# Altium PCB 1602.PcbDoc
Units mil, origin at the board's own origin, x right, y up, seen from the top; angles counter-clockwise.
Board outline 6000 x 4000 mil, 2 copper layers (Top Layer, Bottom Layer); 44 components, 53 nets, 202 pads, 0 vias.
Unrouted connection lines stored in the file: 125.
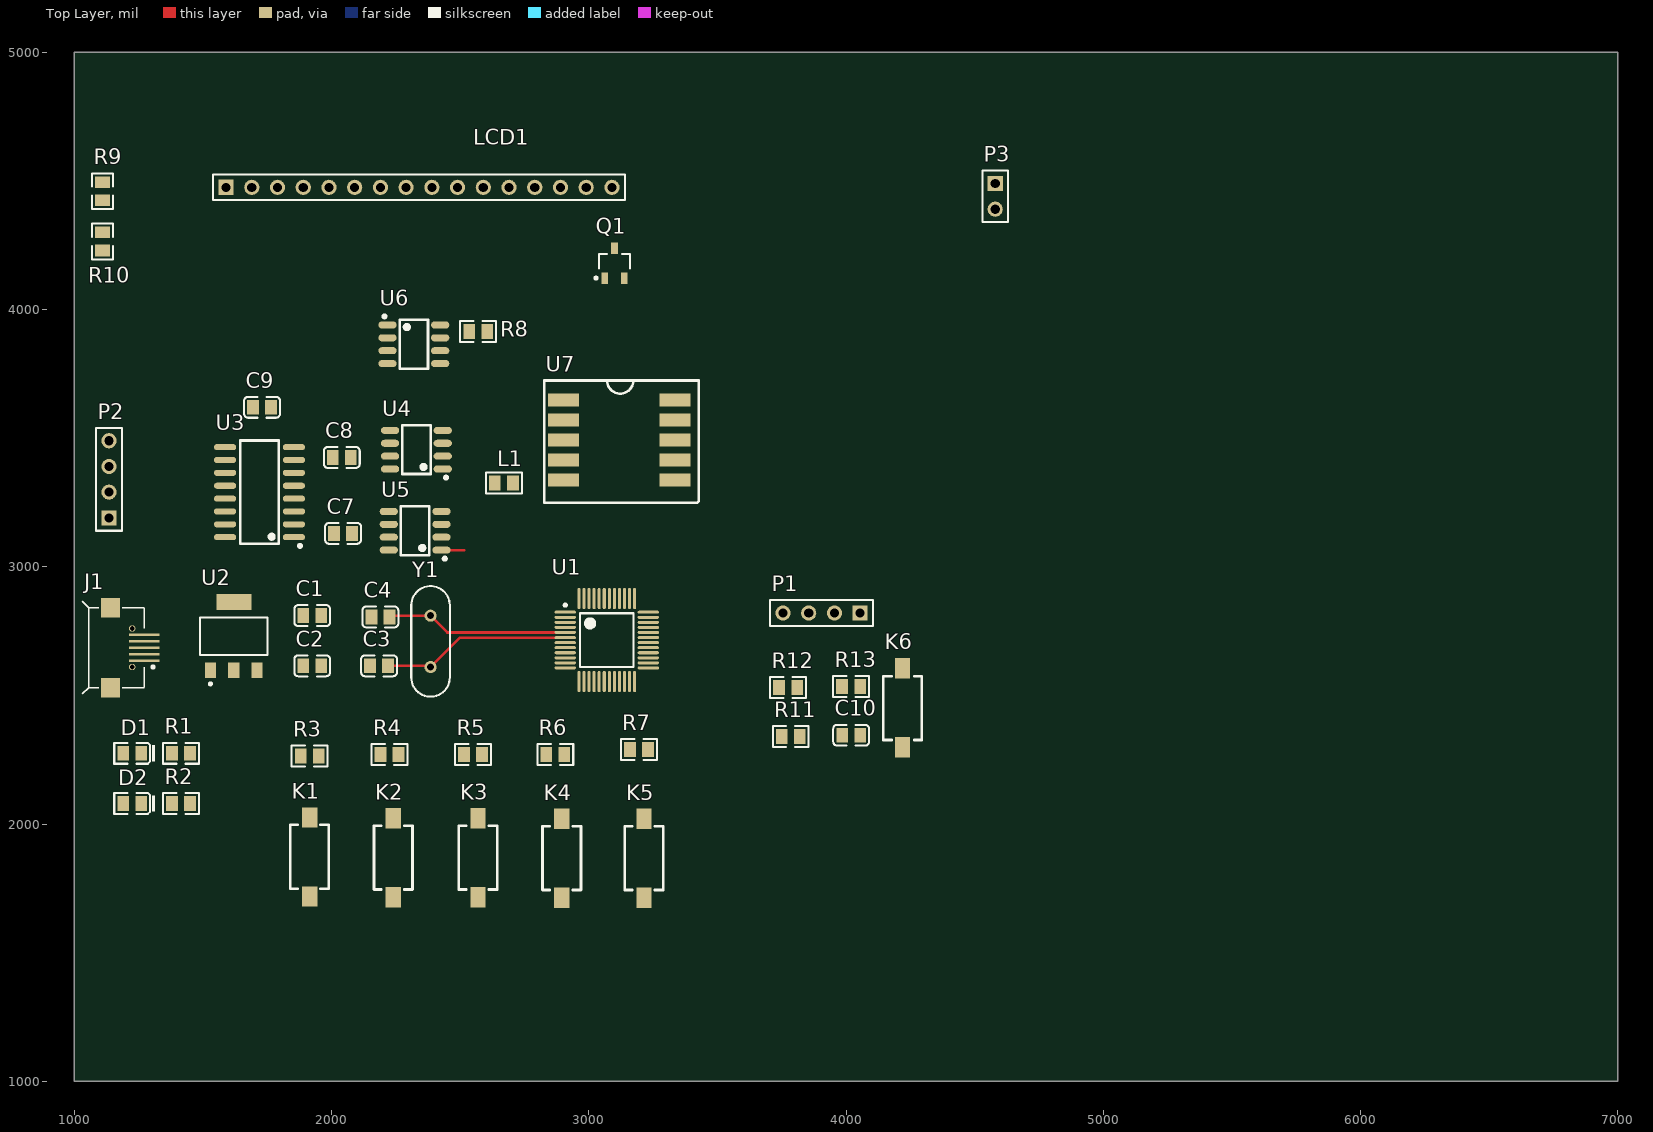
[diagram p0: Top Layer view]
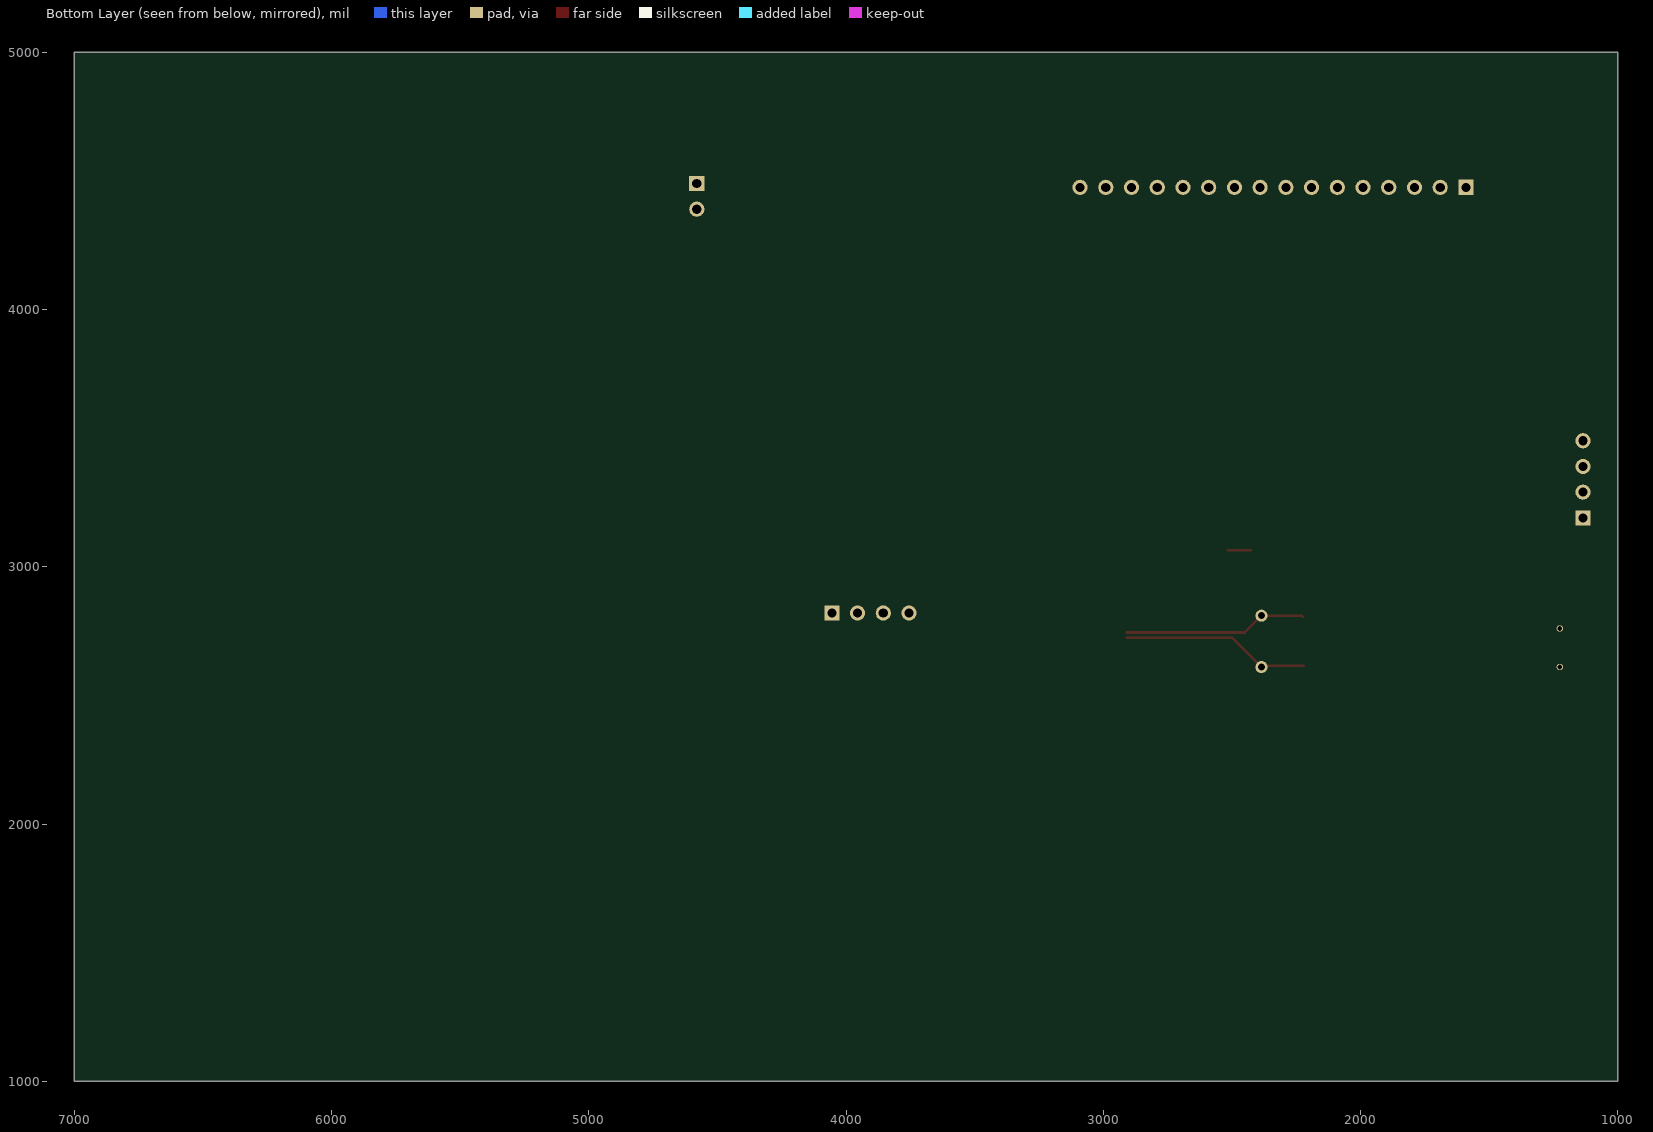
[diagram p1: Bottom Layer view, seen from below]

## Layer stack, top to bottom
Top Solder: solder mask 0.4, Solder Resist, Dk 3.5
Top Layer: signal copper 1.4
Dielectric 1: dielectric 12.6, FR-4, Dk 4.8
Bottom Layer: signal copper 1.4
Bottom Solder: solder mask 0.4, Solder Resist, Dk 3.5

## Board outline
1000,1000 7000,1000 7000,5000 1000,5000

## Design rules (kind name [scope] priority, off if disabled: settings)
Clearance [All] p1: gap=6 ignorepadtopadclearanceinfootprint=FALSE
PolygonConnect [All] p1: connectstyle=Relief reliefconductorwidth=10 reliefentries=4 polygonreliefangle="90 Angle" airgapwidth=10
RoutingVias [All] p1: holewidth=28 width=50 viastyle="Through Hole" minholewidth=28 minwidth=50 maxholewidth=28 maxwidth=50
SolderMaskExpansion [All] p1: expansion=4
Width [All] p1: maxlimit=40 minlimit=8 preferedwidth=10
30 further rules are at their usual default settings.

## Components (designator, comment, footprint, x,y, rotation, side; value= is the part's Value field where it differs from the comment)
C1 "1uF" LC-0805_C 1924.96,2810 r0 top
C2 "0.1uF" LC-0805_C 1924.96,2615 r0 top
C3 "22pf" LC-0805_C 2184.96,2615 r0 top
C4 "22pf" LC-0805_C 2189.96,2805 r0 top
C7 "1UF" LC-0805_C 2044.96,3130 r180 top
C8 "1UF" LC-0805_C 2040,3425 r180 top
C9 "100NF" LC-0805_C 1729.96,3620 r0 top
C10 "1uF" LC-0805_C 4020,2345 r180 top
D1 "SYS_LED" LC-0805_LED_S1 1225.04,2275 r180 top
D2 "PWR_LED" LC-0805_LED_S1 1225.04,2080 r180 top
J1 "USB-MICRO-B" Micro_USB 1055.71,2685.2 r180 top
K1 "" SW-SMD1 1915,2025 r270 top
K2 "" SW-SMD1 2240,2022.09 r270 top
K3 "" SW-SMD1 2570,2022.09 r270 top
K4 "" SW-SMD1 2895,2020 r270 top
K5 "" SW-SMD1 3215,2020 r270 top
K6 "RESET" SW-SMD1 4220,2297.91 r90 top
L1 "1uH ±10%" LC-0805_L 2669.96,3325 r0 top
LCD1 "1602液晶显示器" LCD1602A 1590,4475 r0 top
P1 "SWD" HDR1X4 4055,2820 r180 top
P2 "喇叭" HDR1X4 1135,3190 r90 top
P3 "ANT" HDR1X2 4580,4490 r270 top
Q1 "AO3400A N" LC-SOT-23-3L 3100,4180 r270 top
R1 "1KΩ (1001) ±1%" LC-0805_R 1414.96,2275 r0 top
R2 "1KΩ (1001) ±1%" LC-0805_R 1415,2080 r0 top
R3 "4.7K" LC-0805_R 1914.96,2265 r0 top
R4 "4.7K" LC-0805_R 2224.96,2270 r0 top
R5 "4.7K" LC-0805_R 2550.04,2270 r0 top
R6 "4.7K" LC-0805_R 2869.96,2270 r0 top
R7 "1KΩ (1001) ±1%" LC-0805_R 3194.96,2290 r0 top
R8 "47K" LC-0805_R 2569.96,3915 r0 top
R9 "1KΩ" LC-0805_R 1110,4460 r90 top
R10 "1KΩ" LC-0805_R 1110,4264.96 r90 top
R11 "47k" LC-0805_R 3785,2340 r0 top
R12 "47k" LC-0805_R 3775.04,2530 r180 top
R13 "10K" LC-0805_R 4019.96,2535 r180 top
U1 "STM32F103C8T6" TQFP48 3070,2715 r0 top
U2 "AMS1117" SOT223 1620,2730 r0 top
U3 "PAM8403" LC-SOP-16_208mil 1720,3290 r90 top
U4 "MCP41010" LC-SOP-8_150mil 2330,3455 r90 top
U5 "MCP41010" LC-SOP-8_150mil 2325,3140 r90 top
U6 "EEPROM/AT24C02" LC-SOIC-8_150mil 2320,3865 r270 top
U7 "TEA5767" TEA5767 2902,3649 r0 top
Y1 "12M" XTAL-RAD-0.2 2385,2710 r90 top

## Footprints (in the part's own frame and the unit in brackets; to place one, negate y for a bottom-side part, rotate by r counter-clockwise, add the part's x,y. Pads: shape width x height; smd on the part's side, far side on the other; paste and mask are expansions set on the pad)
HDR1X2 [mm] "Connector; Header; 2 Position"
  rect 1.5x1.5 hole 0.9: 1(0,0)
  round 1.5 hole 0.9: 2(2.54,0)
  silkscreen extent -1.27,-1.27 3.81,1.27, body extent -1.27,-1.27 3.81,1.27, height 7.58
HDR1X4 [mm] "Connector; Header; 4 Position"
  rect 1.5x1.5 hole 0.9: 1(0,0)
  round 1.5 hole 0.9: 2(2.54,0) 3(5.08,0) 4(7.62,0)
  silkscreen extent -1.27,-1.27 8.89,1.27, body extent -1.27,-1.27 8.89,1.27, height 7.58
LC-0805_C [mm]
  rect 1.16x1.47 smd: 1(-0.89,0) 2(0.89,0)
  silkscreen extent -1.77,-1.04 1.77,1.04, body extent -1,-0.62 1,0.63, height 0.77
LC-0805_L [mm]
  rect 1.16x1.47 smd: 1(-0.89,0) 2(0.89,0)
  silkscreen extent -1.77,-1.04 1.77,1.03, body extent -1.02,-0.64 1.03,0.64, height 0.6
LC-0805_LED_S1 [mm]
  rect 1.16x1.47 smd: A(0.89,0) K(-0.89,0)
  silkscreen extent -2.25,-1.04 1.77,1.03, body extent -1.01,-0.62 1.01,0.62, height 1.1
LC-0805_R [mm]
  rect 1.16x1.47 smd: 1(-0.89,0) 2(0.89,0)
  silkscreen extent -1.77,-1.04 1.77,1.03, body extent -1,-0.62 1,0.63, height 0.49
LC-SOIC-8_150mil [mm]
  oval 0.7x1.8 smd: 1(-1.905,-2.6) 2(-0.635,-2.6) 3(0.635,-2.6) 4(1.905,-2.6) 5(1.905,2.6) 6(0.635,2.6) 7(-0.635,2.6) 8(-1.905,2.6)
  silkscreen extent -2.9,-3.05 2.4,1.4
LC-SOP-8_150mil [mm]
  oval 0.7x1.8 smd: 1(-1.905,-2.6) 2(-0.635,-2.6) 3(0.635,-2.6) 4(1.905,-2.6) 5(1.905,2.6) 6(0.635,2.6) 7(-0.635,2.6) 8(-1.905,2.6)
  silkscreen extent -2.9,-3.08 2.4,1.4, body extent -2.5,-3.1 2.5,3.1, height 1.75
LC-SOP-16_208mil [mm]
  oval 0.6x2.2 smd: 1(-4.445,-3.4) 2(-3.175,-3.4) 3(-1.905,-3.4) 4(-0.635,-3.4) 5(0.635,-3.4) 6(1.905,-3.4) 7(3.175,-3.4) 8(4.445,-3.4) 9(4.445,3.4) 10(3.175,3.4) 11(1.905,3.4) 12(0.635,3.4) 13(-0.635,3.4) 14(-1.905,3.4) 15(-3.175,3.4) 16(-4.445,3.4)
  silkscreen extent -5.45,-4.15 5.1,1.9
LC-SOT-23-3L [mm] "http://www.aosmd.com/res/packaging_information/SOT-23-3L.pdf"
  rect 1.15x0.65 smd: 1(1.475,-0.95) 2(1.475,0.95) 3(-1.475,0)
  silkscreen extent -0.9,-1.95 1.6,1.55, body extent -0.9,-1.55 0.9,1.55, height 1.25
LCD1602A [mm] "LCD1602A液晶显示器"
  rect 1.5x1.5 hole 0.9: 1(0,0)
  round 1.5 hole 0.9: 2(2.54,0) 3(5.08,0) 4(7.62,0) 5(10.16,0) 6(12.7,0) 7(15.24,0) 8(17.78,0) 9(20.32,0) 10(22.86,0) 11(25.4,0) 12(27.94,0) 13(30.48,0) 14(33.02,0) 15(35.56,0) 16(38.1,0)
  silkscreen extent -1.27,-1.27 39.37,1.27, body extent -8,-34.5 72.5,2, height 21.34
Micro_USB [mm] "5P 贴片 带定位柱"
  rect 3x0.25 smd: 1(-5.508,1.3) 2(-5.508,0.65) 3(-5.508,0) 4(-5.508,-0.65) 5(-5.508,-1.3)
  round 0.635 hole 0.457 unplated: 6(-4.3,1.9) 7(-4.3,-1.9)
  rect 1.9x1.9 smd: 8(-2.15,3.95) 9(-2.15,-3.95)
  silkscreen extent -6.47,-4.57 0.63,4.57
SOT223 [mm] "SOT-223/SC-73; 4 Leads; Body 6.7 x 7.3 mm, inc. leads (LxW max)"
  rect 1.1x1.55 smd: 1(-2.3,-3.375) 2(0,-3.375) 3(2.3,-3.375)
  rect 3.45x1.55 smd: 4(0,3.375)
  silkscreen extent -3.35,-4.82 3.35,1.85, body extent -3.25,-3.47 3.25,3.49, height 1.66
SW-SMD1 [mm]
  rect 2x1.5 smd: 1(0,0) 2(7.8,0)
  silkscreen extent 0.73,-1.9 7.03,1.9, body extent -0.06,-1.94 7.83,1.91, height 2.5
TEA5767 [mil]
  rect 120x50 smd: 1(0,0) 2(0,-78) 3(0,-156) 4(0,-234) 5(0,-312) 6(433,-312) 7(433,-234) 8(433,-156) 9(433,-78) 10(433,0)
  silkscreen extent -75,-400 525,75
TQFP48 [mm] "Thin QFP, 48-Leads, Body 7x7mm, Pitch 0.5mm, IPC Low Density"
  oval 2.1x0.3 smd: 1(-4.1,2.75) 2(-4.1,2.25) 3(-4.1,1.75) 4(-4.1,1.25) 5(-4.1,0.75) 6(-4.1,0.25) 7(-4.1,-0.25) 8(-4.1,-0.75) 9(-4.1,-1.25) 10(-4.1,-1.75) 11(-4.1,-2.25) 12(-4.1,-2.75) 25(4.1,-2.75) 26(4.1,-2.25) 27(4.1,-1.75) 28(4.1,-1.25) 29(4.1,-0.75) 30(4.1,-0.25) 31(4.1,0.25) 32(4.1,0.75) 33(4.1,1.25) 34(4.1,1.75) 35(4.1,2.25) 36(4.1,2.75)
  oval 0.3x2.1 smd: 13(-2.75,-4.1) 14(-2.25,-4.1) 15(-1.75,-4.1) 16(-1.25,-4.1) 17(-0.75,-4.1) 18(-0.25,-4.1) 19(0.25,-4.1) 20(0.75,-4.1) 21(1.25,-4.1) 22(1.75,-4.1) 23(2.25,-4.1) 24(2.75,-4.1) 37(2.75,4.1) 38(2.25,4.1) 39(1.75,4.1) 40(1.25,4.1) 41(0.75,4.1) 42(0.25,4.1) 43(-0.25,4.1) 44(-0.75,4.1) 45(-1.25,4.1) 46(-1.75,4.1) 47(-2.25,4.1) 48(-2.75,4.1)
  silkscreen extent -4.22,-2.65 2.65,3.57, body extent -4.5,-4.5 4.5,4.5, height 1.2
XTAL-RAD-0.2 [mm] "Radial Cap, Thru-Hole; 2 Leads; 0.2 in Pin Spacing"
  round 1.2 hole 0.7: 1(-2.54,0) 2(2.54,0)
  silkscreen extent -5.46,-1.91 5.46,1.91, body extent -5.33,-2.05 5.33,2.05, height 3.22

## Part data
C1 C2 C3 C4 C7 C8 C9 C10: library part "0805 1uF (105) 10% 50V", "贴片电容", Package=0805, SuppliersPartNumber=C28323, ComponentLink1Description=供应商链接, ComponentLink1URL=http://www.szlcsc.com/product/details_29074.html, Supplier=LC
D1 D2: library part "0805 翠绿", "发光二极管", Package=0805, SuppliersPartNumber=C2297, ComponentLink1Description=供应商链接, ComponentLink1URL=http://www.szlcsc.com/product/details_2670.html, Supplier=LC
J1: "USB 2.0, Right Angle, SMT, A Type, Receptacle, 5 Position, Black", PackageDocument=15-Nov-2002, ComponentLink1Description="Manufacturer Link", ComponentLink1URL=http://www.tycoelectronics.com/, ComponentLink2Description="Packaging Specification", ComponentLink2URL=http://ecommas.tycoelectronics.com/commerce/DocumentDelivery/DDEController?Action=showdoc&DocId=Customer+Drawing%7F440478%7FB%7Fpdf%7FEnglish%7FC_440478_B.pdf, ContactMaterial="Phosphor Bronze", ContactPlating="Gold (30) over Nickel", DatasheetDocument=15-Nov-2002, DrillSize="Corresponds to nominal value.", HousingMaterial=Thermoplastic, PackageReference=440478, PanelGround=Without, PCB_Layout="Complies with manufacturer's recommendation.", Published=15-Jul-2004, Publisher="Altium Limited"
K1 K2 K3 K4 K5 K6: library part BUTTON-S
L1: library part "0805 1uH 10%", "贴片电感", Package=0805, SuppliersPartNumber=C1042, ComponentLink1Description=供应商链接, ComponentLink1URL=http://www.szlcsc.com/product/details_1394.html, Supplier=LC
P1 P2: library part "Header 4", "Header, 4-Pin", LatestRevisionDate=17-Jul-2002, LatestRevisionNote="Re-released for DXP Platform.", Publisher="Altium Limited"
P3: library part "Header 2", "Header, 2-Pin", LatestRevisionDate=17-Jul-2002, LatestRevisionNote="Re-released for DXP Platform.", Publisher="Altium Limited"
Q1: library part "AO3400A N道沟 X0YV1T SOT-23", "MOS(场效应管)", Package=SOT-23, SuppliersPartNumber=C20917, ComponentLink1Description=供应商链接, ComponentLink1URL=http://www.szlcsc.com/product/details_21629.html, Supplier=LC
R1 R2 R3 R4 R5 R6 R7 R8 R9 R10 R13: library part "0805 1KΩ (1001) 1%", "贴片电阻", Package=0805, SuppliersPartNumber=C17513, ComponentLink1Description=供应商链接, ComponentLink1URL=http://www.szlcsc.com/product/details_18201.html, Supplier=LC
R11 R12: library part "0805 1.5KΩ (1501) 1%", "贴片电阻", Package=0805, SuppliersPartNumber=C4310, ComponentLink1Description=供应商链接, ComponentLink1URL=http://www.szlcsc.com/product/details_4717.html, Supplier=LC
U1: "STM32 ARM-based 32-bit MCU with 64 Kbytes Flash, 48-pin LQFP, Industrial Temperature", ComponentLink1Description="Manufacturer Link", ComponentLink1URL=www.st.com/stm32, ComponentLink2Description=Datasheet, ComponentLink2URL=http://www.st.com/stonline/products/literature/ds/13587.pdf, DatasheetVersion="rev6, Mar-2008", PackageDescription="48-Pin Low-Profile Quad Flat Pack, 7 x 7 mm Body, 0.5 mm Pitch (LQFP48)", PackageReference=LQFP48, PackageVersion=Mar-2008, Published=30-May-2008, Publisher="Altium Limited"
U2: "800mA and 1A Low Dropout Positive Regulator 2.85V, 3.3V, 5V, and Adjustable", ComponentLink1Description="Manufacturer Link", ComponentLink1URL=http://www.ti.com/, ComponentLink2Description=Datasheet, ComponentLink2URL=http://www-s.ti.com/sc/ds/REG1117.pdf, DatasheetVersion=Sep-1997, LatestRevisionDate=17-Jul-2002, LatestRevisionNote="Re-released for DXP Platform.", PackageDescription="SOT-223/SC-73; 4 Leads; Body 6.7 x 7.3 mm, inc. leads (LxW max)", PackageReference=ZZ311, PackageVersion=revC, Published=8-Jun-2000, Publisher="Altium Limited"
U6: library part EEPROM/AT24C256C-SSHL-T, "EEPROM", Package=SOIC-8_150mil, SuppliersPartNumber=C6482, ComponentLink1Description=供应商链接, ComponentLink1URL=http://www.szlcsc.com/product/details_6947.html, Supplier=LC
Y1: library part XTAL, "晶体振荡器", LatestRevisionDate=17-Jul-2002, LatestRevisionNote="Re-released for DXP Platform.", PackageReference=R38, Published=8-Jun-2000, Publisher="Altium Limited"

## Nets (pads, with @x,y where several pads share a name; then routed paths per layer and width w, separated by ;. In a path a pad name is that pad's centre, name@x,y a point inside that pad or via, vN(x,y) a via of type N, cw(c..) or ccw(c..) an arc to the next point about the centre after c; other vN are vias at no path point)
33V_OUT: D1.A D2.A L1.1 LCD1.2 LCD1.15 P1.1 R3.1 R4.1 R5.1 R6.1 R7.1 R8.2 R9.2 R13.2 U1.9 U1.24 U1.36 U1.48 U3.4 U3.6 U3.13 U4.8 U5.8 U6.8
D0: LCD1.7 U1.45
D1: LCD1.8 U1.46
D2: LCD1.9 U1.21
D3: LCD1.10 U1.22
D4: LCD1.11 U1.25
D5: LCD1.12 U1.26
D6: LCD1.13 U1.27
D7: LCD1.14 U1.28
DC5V: J1.5 U2.3
E: LCD1.6 U1.12
GND: C1.1 C2.1 C3.1 C4.1 C9.1 C10.1 J1.1 K1.2 K2.2 K3.2 K4.2 K5.2 K6.1 LCD1.1 P1.4 Q1.2 R2.2 R10.1 R11.2 R12.1 U1.8 U1.23 U1.35 U1.47 U2.1 U3.2 U3.11 U3.15 U4.4 U5.4 U6.1 U6.2 U6.3 U6.4 U7.3 U7.4 U7.6 U7.9
KEY1: K1.1 R3.2 U1.14
KEY2: K2.1 R4.2 U1.30
KEY3: K3.1 R5.2 U1.31
KEY4: K4.1 R6.2 U1.32
KEY5: K5.1 R7.2 U1.33
L_IN: U4.5 U4.6 U7.7
L_OUT: C8.2 U3.7
L_OUT+: P2.1 U3.1
L_OUT-: P2.2 U3.3
MEM_SCL: U1.42 U6.6 U7.2
MEM_SDA: U1.43 U6.5 U7.1
NetC1_2: C1.2 C2.2 U2.2 U2.4
NetC7_1: C7.1 U5.7
NetC8_1: C8.1 U4.7
NetC9_2: C9.2 U3.8
NetD1_K: D1.K R1.1
NetD2_K: D2.K R2.1
NetL1_2: L1.2 U7.5
NetP3_2: P3.2 U7.10
NetR8_1: R8.1 U6.7
NetR11_1: R11.1 U1.20
NetR12_2: R12.2 U1.44
OSC_12M_1: C4.2 U1.5 Y1.2 | length 712.8
  Top Layer w10: C4.2 2230,2810 Y1.2 2450.47,2744.53 U1.5
OSC_12M_2: C3.2 U1.6 Y1.1 | length 738.2
  Top Layer w10: C3.2 2380,2615 Y1.1 2499.84,2724.84 U1.6
PWM: LCD1.16 Q1.3
PWM_IO: Q1.1 U1.29
R/W: LCD1.5 U1.11
R_IN: U5.5 U5.6 U7.8
R_OUT: C7.2 U3.10
R_OUT+: P2.3 U3.16
R_OUT-: P2.4 U3.14
RES_CS0: U1.18 U4.1
RES_CS1: U1.19 U5.1 | length 87.6
  Top Layer w10: U5.1 2515,3065
RES_MOSI: U1.17 U4.3 U5.3
RES_SCK: U1.15 U4.2 U5.2
RS: LCD1.4 U1.10
RST: C10.2 K6.2 R13.1 U1.7
SWD_IO: P1.2 U1.34
SWD_SCL: P1.3 U1.37
SYS_LED: R1.2 U1.13
V0: LCD1.3 R9.1 R10.2
pads on no net: J1.2 J1.3 J1.4 J1.6 J1.7 J1.8 J1.9 P3.1 U1.1 U1.2 U1.3 U1.4 U1.16 U1.38 U1.39 U1.40 U1.41 U3.5 U3.9 U3.12